# EAGLE board Dumptruck2017 (EAGLE 7.6.0)
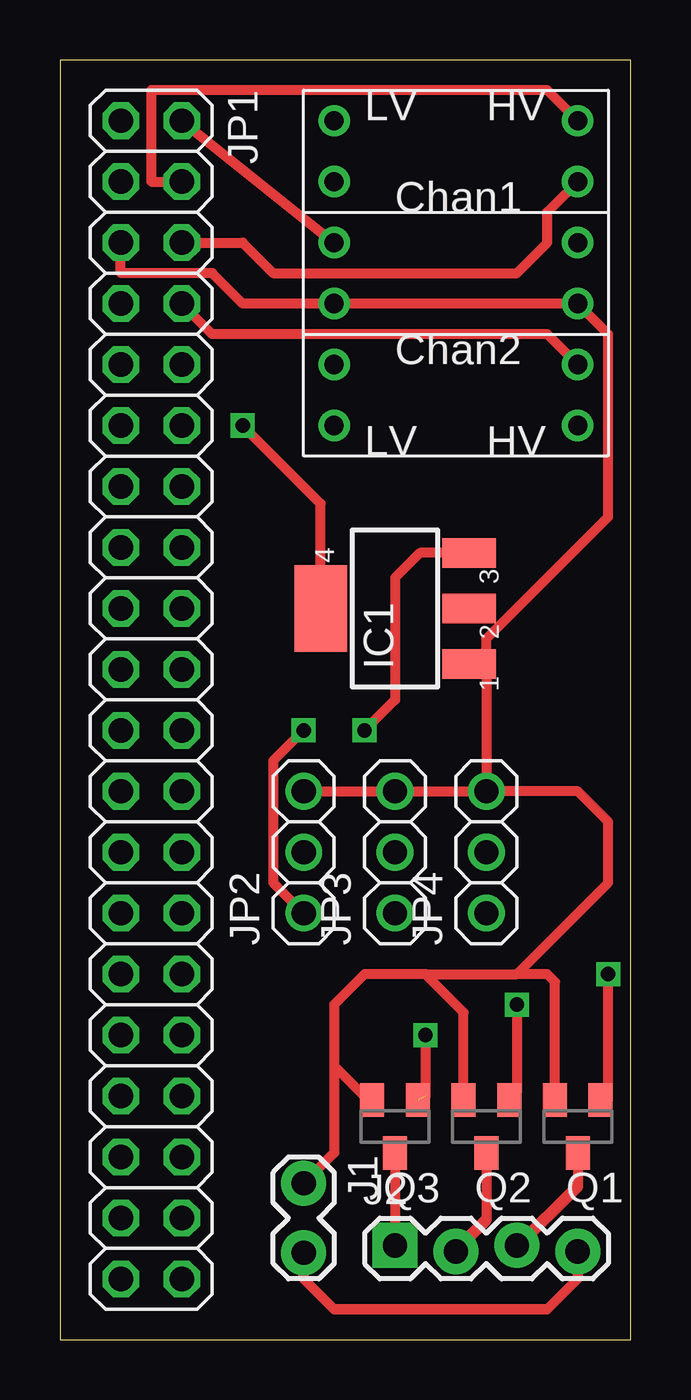
[diagram p0: board, top side]
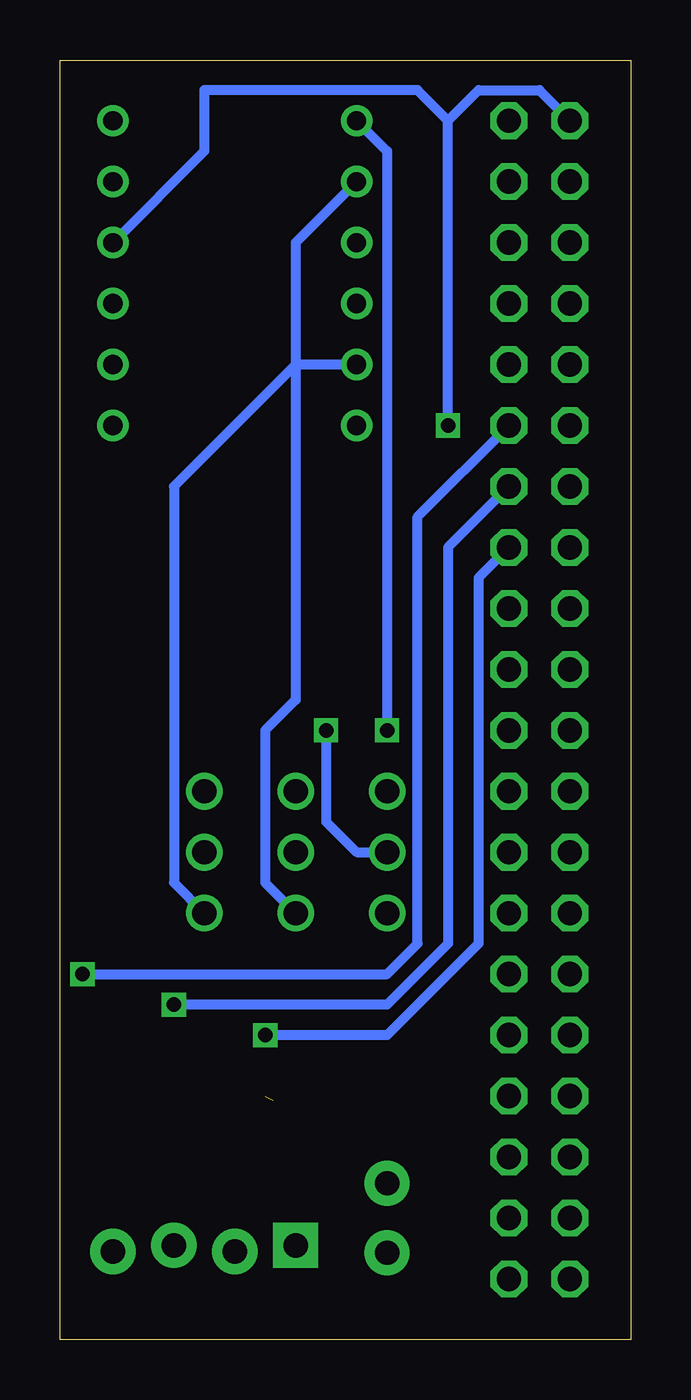
[diagram p1: board, bottom side, seen from below]

Size 23.8 x 53.33 mm. Coordinates in mm from the lower left corner, seen from the top.
Outline: 0,0 23.8,0 23.8,53.33 0,53.33 0,0
Copper layers (1*16): Top 0.035mm / dielectric 1.5mm / Bottom 0.035mm
Design rules "default": minimum track width 10mil, minimum drill 24mil, track to track 8mil, track to pad 8mil, pad to pad 8mil, via to via 8mil, smd to smd 8mil, copper to edge 40mil, drill to drill 8mil, minimum pad ring 10mil, minimum via ring 8mil, stop-mask expansion 4mil, vias tented up to drill 0mil, thermal gap 10mil

## Footprints (pad centres in the part's own frame; a part is rotated, then mirrored left to right if it is on the bottom)
SOT223 = smd 1.219 x 2.235: 1 -2.311,-3.099; 2 0,-3.099; 3 2.311,-3.099 | smd 3.6 x 2.2: 4 0,3.099
1X02_LOCK = drill 1.016 pad 1.88: 1 -0.178,0; 2 2.718,0
1X04_LOCK = drill 1.016 pad 1.88 square: 1 0,0.127 | drill 1.016 pad 1.88: 2 2.54,-0.127; 3 5.08,0.127; 4 7.62,-0.127
2X20 = drill 1.016 octagon: 1 -24.13,-1.27; 2 -24.13,1.27; 3 -21.59,-1.27; 4 -21.59,1.27; 5 -19.05,-1.27; 6 -19.05,1.27; 7 -16.51,-1.27; 8 -16.51,1.27; 9 -13.97,-1.27; 10 -13.97,1.27; 11 -11.43,-1.27; 12 -11.43,1.27; 13 -8.89,-1.27; 14 -8.89,1.27; 15 -6.35,-1.27; 16 -6.35,1.27; 17 -3.81,-1.27; 18 -3.81,1.27; 19 -1.27,-1.27; 20 -1.27,1.27; 21 1.27,-1.27; 22 1.27,1.27; 23 3.81,-1.27; 24 3.81,1.27; 25 6.35,-1.27; 26 6.35,1.27; 27 8.89,-1.27; 28 8.89,1.27; 29 11.43,-1.27; 30 11.43,1.27; 31 13.97,-1.27; 32 13.97,1.27; 33 16.51,-1.27; 34 16.51,1.27; 35 19.05,-1.27; 36 19.05,1.27; 37 21.59,-1.27; 38 21.59,1.27; 39 24.13,-1.27; 40 24.13,1.27
1X03 = drill 1.016: 1 -2.54,0; 2 0,0; 3 2.54,0
SOT23 = smd 1 x 1.4: 1 -0.95,-1.1; 2 0.95,-1.1; 3 0,1.1
LOGIC_LEVEL_CONVERTER = drill 0.8: P$1 1.27,13.97; P$2 1.27,11.43; P$3 1.27,8.89; P$4 1.27,6.35; P$5 1.27,3.81; P$6 1.27,1.27; P$7 11.43,1.27; P$8 11.43,3.81; P$9 11.43,6.35; P$10 11.43,8.89; P$11 11.43,11.43; P$12 11.43,13.97

## Placement (x,y rotation side)
IC1  317EMP  [SOT223]  13.97,30.48 90 top
J1  [1X02_LOCK]  10.16,6.35 270 top
J2  [1X04_LOCK]  13.97,3.81 0 top
JP1  [2X20]  3.81,26.67 270 top
JP2  [1X03]  10.16,20.32 90 top
JP3  [1X03]  13.97,20.32 90 top
JP4  [1X03]  17.78,20.32 90 top
Q1  [SOT23]  21.59,8.89 180 top
Q2  [SOT23]  17.78,8.89 180 top
Q3  [SOT23]  13.97,8.89 180 top
U$1  LOGIC_LEVEL_CONVERTER  [LOGIC_LEVEL_CONVERTER]  10.16,36.83 0 top

## Library data of the parts
IC1 = linear
J1 = SparkFun-Connectors
J2 = SparkFun-Connectors; PROD_ID: CONN-09696
JP1-JP4 Q1-Q3 = adafruit
U$1 = SparkFun-Boards

## Nets
+3V3: JP1.2 U$1.P$3
+5V: IC1.4 JP1.1 U$1.P$10
+12V: J1.2 J2.4
+24V: IC1.3 JP2.2
ARM_MTR_H: JP4.1 U$1.P$5
ARM_MTR_L: JP1.8 U$1.P$8
GND: IC1.1 J1.1 JP1.5 JP2.3 JP3.3 JP4.3 Q1.2 Q2.2 Q3.2 U$1.P$4 U$1.P$9
L_MTR_H: JP2.1 U$1.P$1
L_MTR_L: JP1.4 U$1.P$12
LED1_PWR: J2.3 Q1.3
LED1_SIG: JP1.12 Q1.1
LED2_PWR: J2.2 Q2.3
LED2_SIG: JP1.14 Q2.1
LED3_PWR: J2.1 Q3.3
LED3_SIG: JP1.16 Q3.1
R_MTR_H: JP3.1 U$1.P$2
R_MTR_L: JP1.6 U$1.P$11

## Tracks (layer width: path | path; a pad name or v marks a point on that pad's centre or on a via)
+3V3
  Top 0.406: JP1.2 U$1.P$3
+5V  (via drill 0.6)
  Top 0.406: IC1.4 10.87,34.85 v7.62,38.1
  Bottom 0.406: v7.62,38.1 7.62,50.8 | 7.62,50.8 6.35,52.07 3.81,52.07 JP1.1 | 7.62,50.8 8.89,52.07 17.78,52.07 17.78,49.53 U$1.P$10
+12V
  Top 0.406: J1.2 10.16,2.54 11.43,1.27 20.32,1.27 21.59,2.54 J2.4
+24V  (via drill 0.6)
  Top 0.406: IC1.3 15.01,32.79 13.97,31.75 13.97,26.67 v12.7,25.4
  Bottom 0.406: v12.7,25.4 12.7,21.59 11.43,20.32 JP2.2
ARM_MTR_H
  Bottom 0.406: U$1.P$5 13.97,40.64 19.05,35.56 19.05,19.05 JP4.1
ARM_MTR_L
  Top 0.406: U$1.P$8 20.32,41.91 6.35,41.91 JP1.8
GND
  Top 0.406: JP4.3 JP3.3 JP2.3 | IC1.1 17.78,28.17 | 17.78,28.17 JP4.3 | JP1.5 2.54,44.45 6.35,44.45 7.62,43.18 U$1.P$4 U$1.P$9 22.86,41.91 22.86,34.29 17.78,29.21 17.78,28.17 | Q1.2 20.64,14.92 20.32,15.24 19.05,15.24 | 15.24,15.24 12.7,15.24 11.43,13.97 11.43,11.43 | 11.43,11.43 11.43,7.8 J1.1 | Q2.2 16.83,13.65 15.24,15.24 | Q3.2 12.87,9.99 11.43,11.43 | 15.24,15.24 19.05,15.24 | 19.05,15.24 22.86,19.05 22.86,21.59 21.59,22.86 JP4.3
L_MTR_H  (via drill 0.6)
  Top 0.406: v10.16,25.4 8.89,24.13 8.89,19.05 JP2.1
  Bottom 0.406: U$1.P$1 10.16,49.53 v10.16,25.4
L_MTR_L
  Top 0.406: U$1.P$12 20.32,52.07 3.81,52.07 3.81,48.26 JP1.4
LED1_PWR
  Top 0.406: Q1.3 21.59,6.35 21.46,6.35 J2.3
LED1_SIG  (via drill 0.6)
  Top 0.406: Q1.1 22.86,9.99 v22.86,15.24
  Bottom 0.406: v22.86,15.24 10.16,15.24 8.89,16.51 8.89,34.29 JP1.12
LED2_PWR
  Top 0.406: Q2.3 17.78,4.95 J2.2
LED2_SIG  (via drill 0.6)
  Top 0.406: v19.05,13.97 19.05,10.31 Q2.1
  Bottom 0.406: JP1.14 7.62,33.02 7.62,16.51 10.16,13.97 v19.05,13.97
LED3_PWR
  Top 0.406: Q3.3 J2.1
LED3_SIG  (via drill 0.6)  (1 unrouted)
  Top 0.406: v15.24,12.7 15.24,10.16
  Bottom 0.406: JP1.16 6.35,31.75 6.35,16.51 10.16,12.7 v15.24,12.7
N$1
  Top 0.406: 21.59,7.62 21.59,6.35 19.05,3.81
N$2
  Top 0.406: 17.78,7.62 17.78,5.08 16.51,3.81
N$3
  Top 0.406: 13.97,7.62 13.97,3.81
N$4
  Top 0.406: 21.59,3.81 21.59,2.54 20.32,1.27 11.43,1.27 10.16,2.54 10.16,3.81
R_MTR_H
  Bottom 0.406: U$1.P$2 13.97,45.72 13.97,26.67 15.24,25.4 15.24,19.05 JP3.1
R_MTR_L
  Top 0.406: JP1.6 7.62,45.72 8.89,44.45 19.05,44.45 20.32,45.72 20.32,46.99 U$1.P$11